# Altium PCB zhangting v0.0.PcbDoc
Units mil, origin at the board's own origin, x right, y up, seen from the top; angles counter-clockwise.
Board outline 3228.35 x 2559.06 mil, 2 copper layers (Top Layer, Bottom Layer); 70 components, 69 nets, 305 pads, 291 vias.
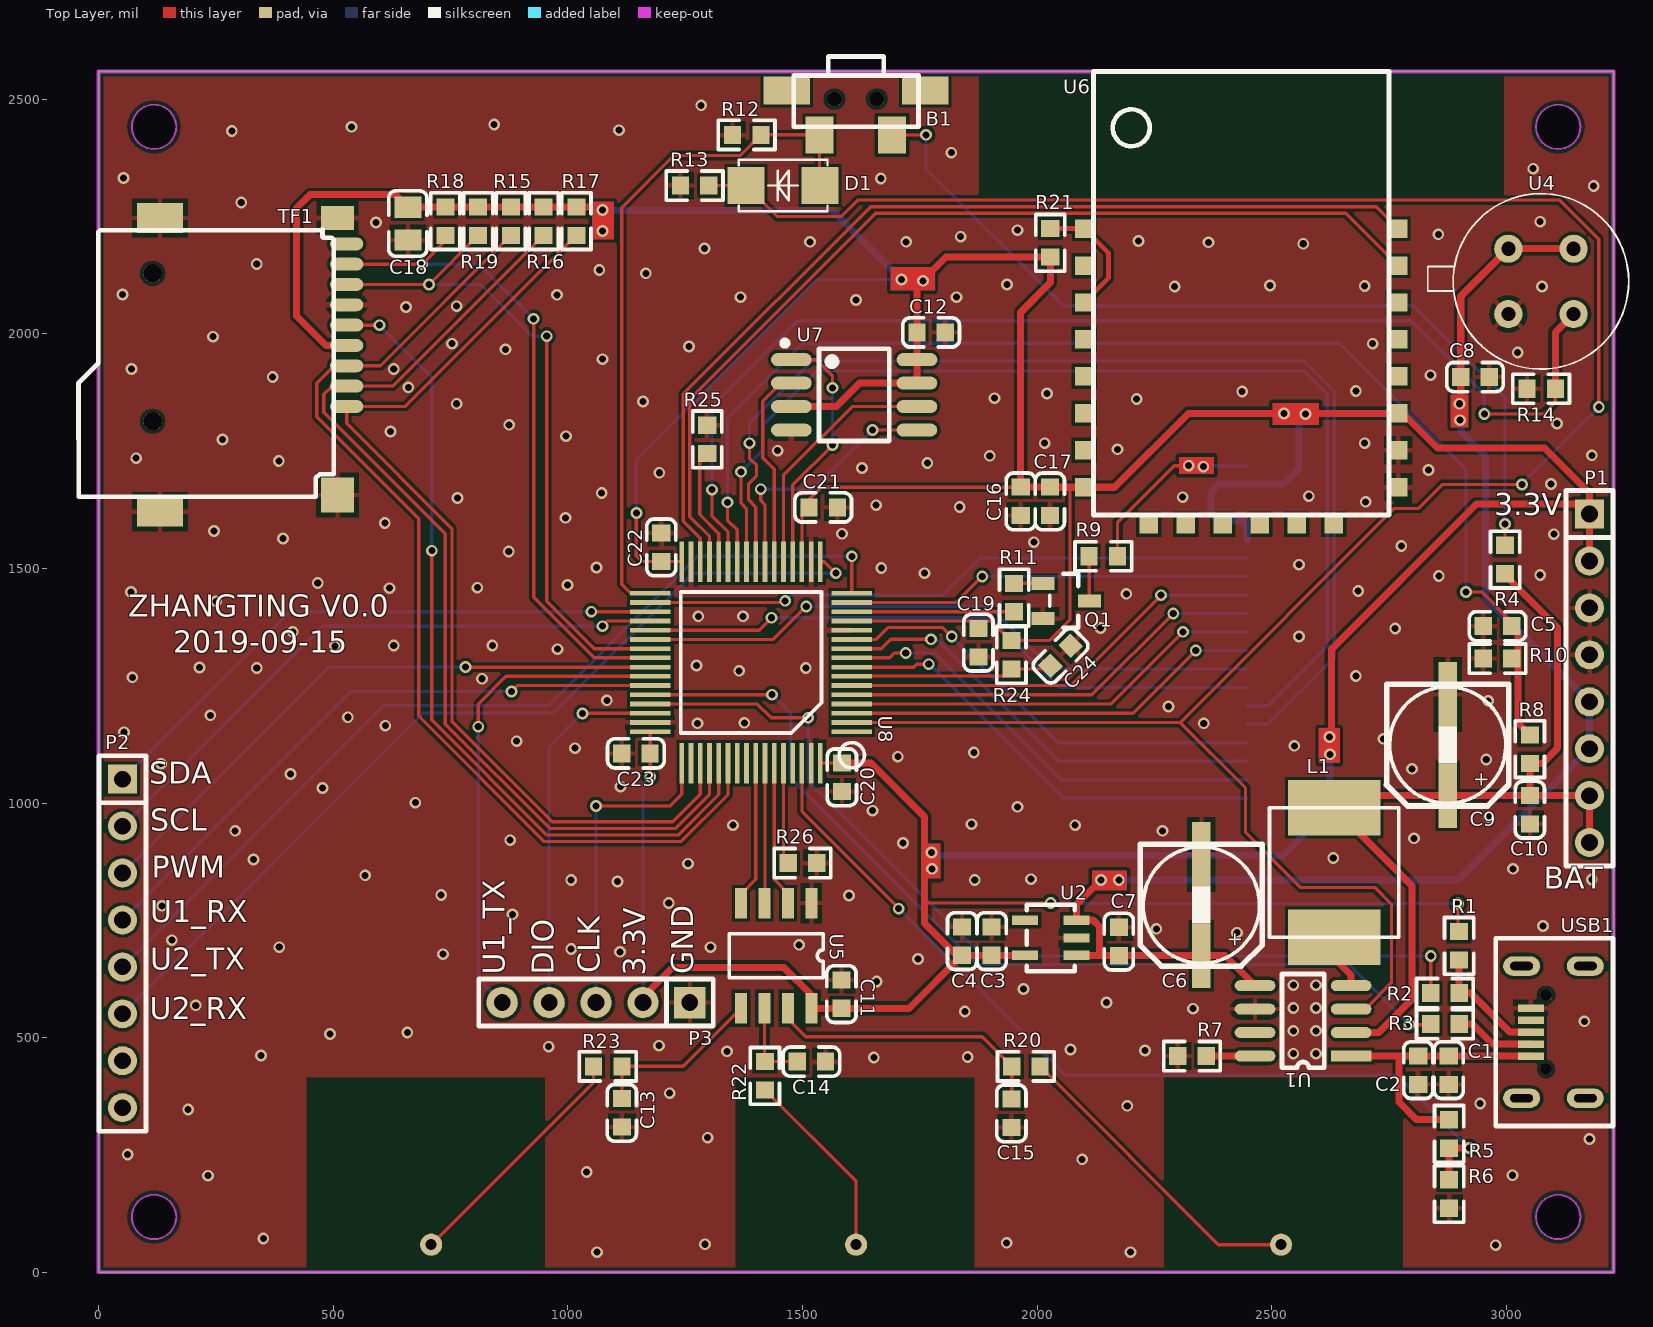
[diagram p0: Top Layer view]
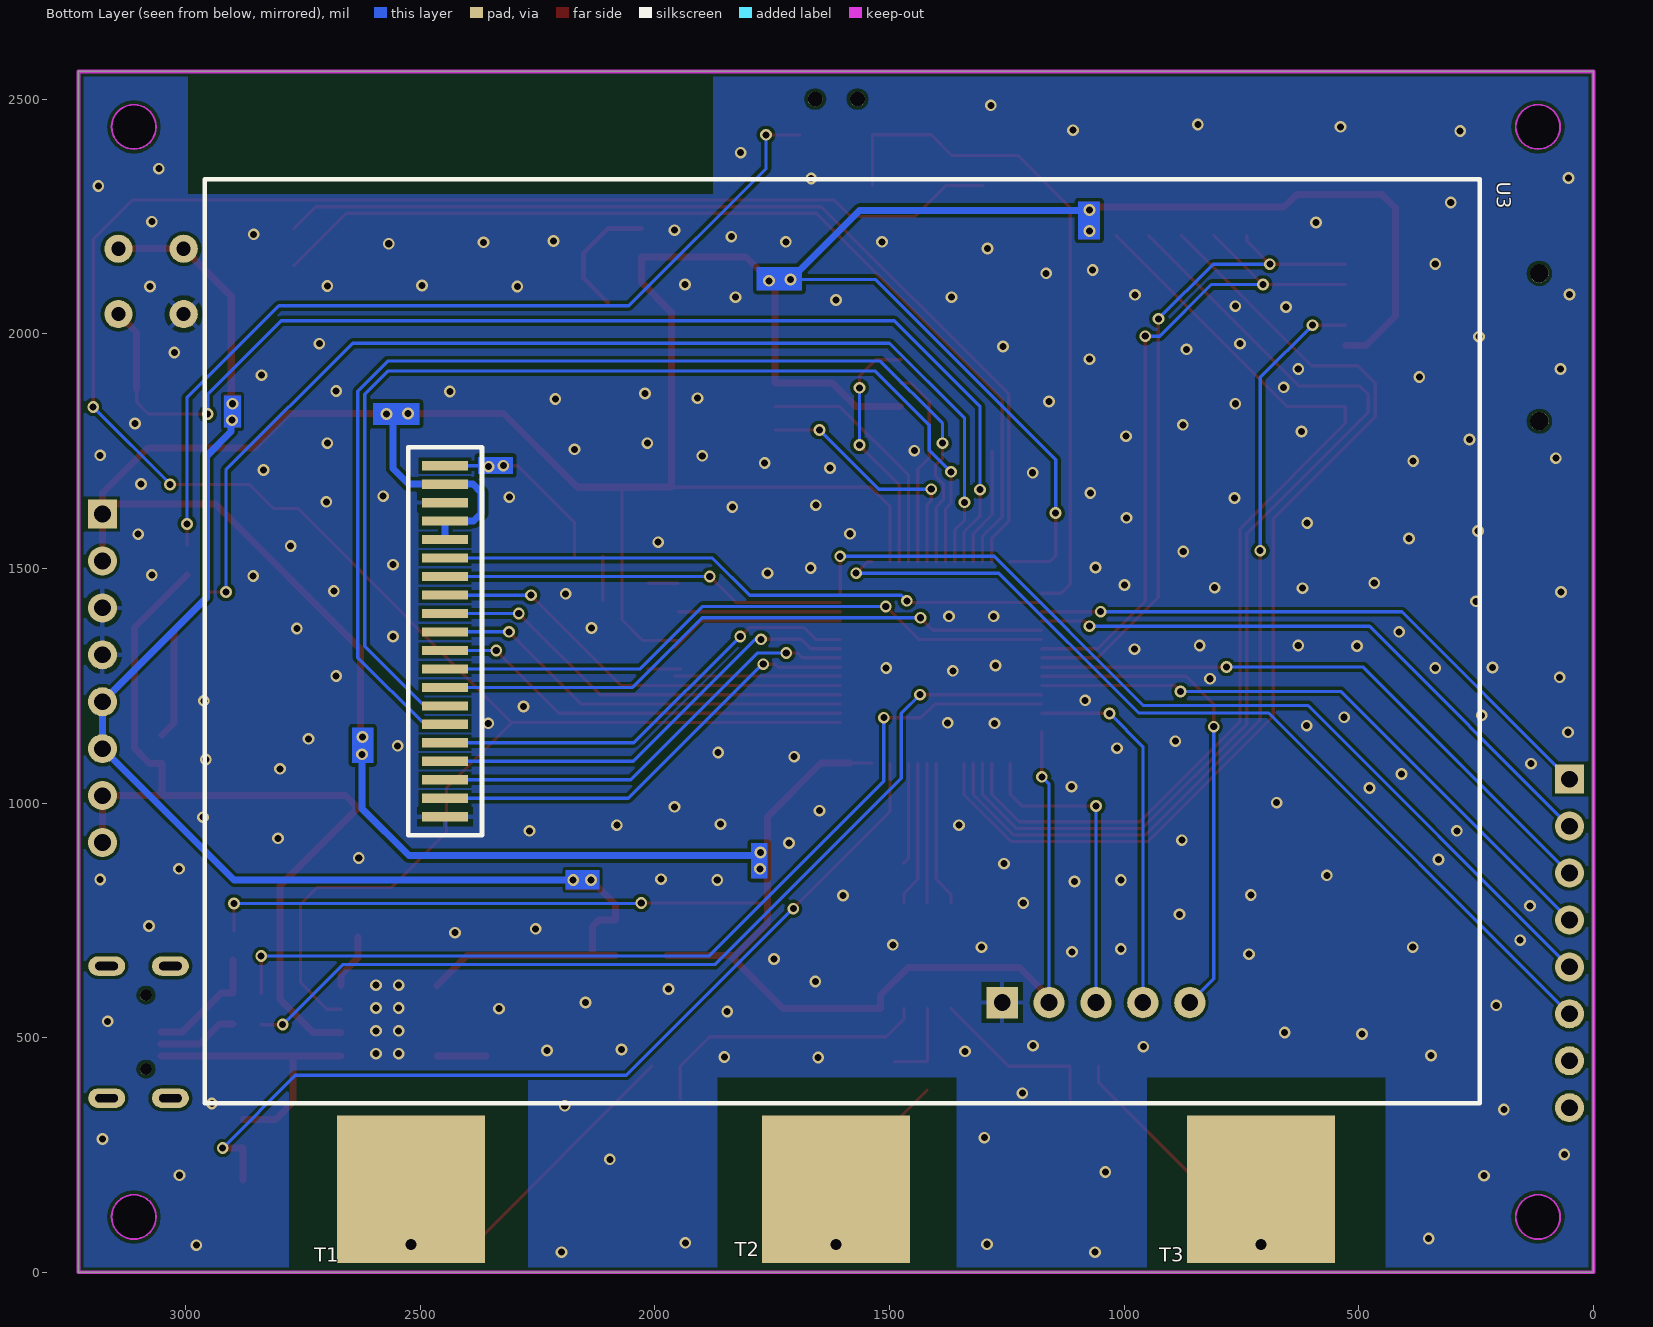
[diagram p1: Bottom Layer view, seen from below]
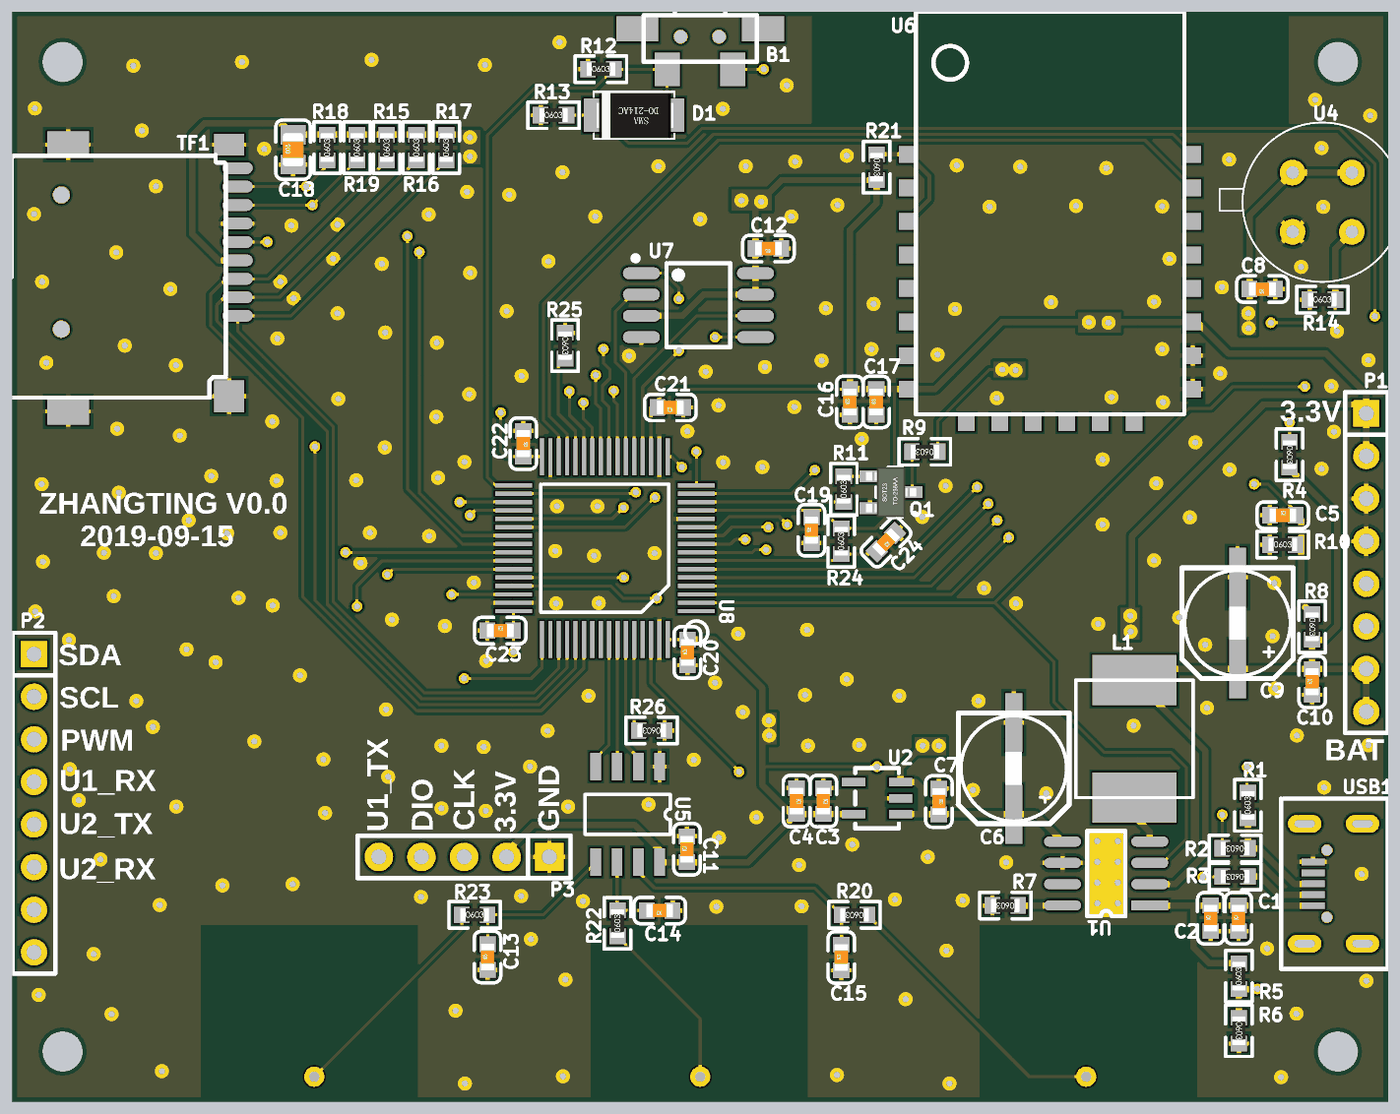
[diagram p2: 3D render of the assembled board from above, using the file's embedded part models]

## Layer stack, top to bottom
Top Layer: signal copper 1.4
Dielectric: dielectric 12.6, FR-4, Dk 4.8
Bottom Layer: signal copper 1.4

## Board outline
0,0 3228.35,0 3228.35,2559.06 0,2559.06
cut-out: 3062.99,118.11 ccw(c3110.24,118.11) 3110.24,70.87 ccw(c3110.24,118.11) 3157.48,118.11 ccw(c3110.24,118.11) 3110.24,165.35 ccw(c3110.24,118.11)
cut-out: 70.87,118.11 ccw(c118.11,118.11) 118.11,70.87 ccw(c118.11,118.11) 165.35,118.11 ccw(c118.11,118.11) 118.11,165.35 ccw(c118.11,118.11)
cut-out: 118.11,2393.7 cw(c118.11,2440.94) 70.87,2440.94 cw(c118.11,2440.94) 118.11,2488.19 cw(c118.11,2440.94) 165.35,2440.94 cw(c118.11,2440.94)
cut-out: 3062.99,2440.94 ccw(c3110.24,2440.94) 3110.24,2393.7 ccw(c3110.24,2440.94) 3157.48,2440.94 ccw(c3110.24,2440.94) 3110.24,2488.19 ccw(c3110.24,2440.94)

## Design rules (kind name [scope] priority, off if disabled: settings)
Clearance [All] p1: gap=7
ComponentClearance [All] p1: gap=0 collisioncheckmode=3 verticalgap=0 showdistances=FALSE
HoleToHoleClearance [All] p1: gap=0 allowstackedmicrovias=TRUE
MinimumSolderMaskSliver [All] p1: minsoldermaskwidth=0
PolygonConnect PolygonConnect_1 [IsVia] p1: connectstyle=Direct reliefconductorwidth=10 reliefentries=4 polygonreliefangle="90 Angle" airgapwidth=10
PolygonConnect [All] p2: connectstyle=Relief reliefconductorwidth=10 reliefentries=4 polygonreliefangle="90 Angle" airgapwidth=10
RoutingVias [All] p1: holewidth=25 width=35 viastyle="Through Hole" minholewidth=15 minwidth=25 maxholewidth=80 maxwidth=100
SilkToSilkClearance [All] p1: silktosilkclearance=0
SilkToSolderMaskClearance [IsPad] p1: minsilkscreentomaskgap=0 clearancetoexposedcopper=TRUE
SolderMaskExpansion [All] p1: expansion=4
Width [All] p1: maxlimit=35 minlimit=7 preferedwidth=10
23 further rules are at their usual default settings.

## Components (designator, comment, footprint, x,y, rotation, side; value= is the part's Value field where it differs from the comment)
B1 "BUTTON侧贴" BUTTON侧贴 1614,2499 r0 top locked
C1 "10uF (106) 10% 10V" 0603_C 2877,431 r90 top
C2 "100nF (104) 10% 50V" 0603_C 2812,431 r90 top
C3 "10uF (106) 10% 10V" 0603_C 1903,706 r270 top
C4 "100nF (104) 10% 50V" 0603_C 1840,706 r270 top
C5 "100nF (104) 10% 50V" 0603_C 2981,1377 r0 top
C6 "220uF/10V" SMD-6.5mm 2348,777 r90 top
C7 "100nF (104) 10% 50V" 0603_C 2174,705 r270 top
C8 "100nF (104) 10% 50V" 0603_C 2933,1908 r180 top
C9 "220uF/10V" SMD-6.5mm 2873,1118 r90 top
C10 "100nF (104) 10% 50V" 0603_C 3050,986 r90 top
C11 "100nF (104) 10% 50V" 0603_C 1583,593 r90 top
C12 "100nF (104) 10% 50V" 0603_C 1774,2003 r180 top
C13 "20pF (200) 5% 50V" 0603_C 1115,340 r90 top
C14 "20pF (200) 5% 50V" 0603_C 1519,449 r180 top
C15 "20pF (200) 5% 50V" 0603_C 1945,339 r90 top
C16 "10uF (106) 10% 10V" 0603_C 1965,1643 r90 top
C17 "100nF (104) 10% 50V" 0603_C 2027,1643 r90 top
C18 "100nF(104) 10% 50V" 0805_C 659,2235 r90 top
C19 "100nF (104) 10% 50V" 0603_C 1875,1342 r90 top
C20 "100nF (104) 10% 50V" 0603_C 1584,1055 r90 top
C21 "100nF (104) 10% 50V" 0603_C 1544,1630 r180 top
C22 "100nF (104) 10% 50V" 0603_C 1199,1545 r270 top
C23 "100nF (104) 10% 50V" 0603_C 1145,1106 r0 top
C24 "100nF (104) 10% 50V" 0603_C 2050,1314 r225 top
D1 "IN4148" DIODE(SMA) 1380,2316 r90 top
L1 "2.2uH" L(CD74) 2633,852 r270 top
P1 "2.54*8" 2.54*8 3177,1616 r270 top locked
P2 "2.54*8" 2.54*8 51,1051 r270 top locked
P3 "2.54*5" 2.54*5 1260,575 r180 top
Q1 "SS8050 Y1" SOT-23(SOT-23-3) 2062,1431 r180 top
R1 "1.5KΩ (1501) ±1%" 0603_R 2899,696 r90 top
R2 "22Ω (22R0) ±1%" 0603_R 2869,595 r180 top
R3 "22Ω (22R0) ±1%" 0603_R 2869,529 r180 top
R4 "2KΩ (2001) ±1%" 0603_R 2997,1519 r270 top
R5 "2KΩ (2001) ±1%" 0603_R 2878,295 r90 top
R6 "3KΩ (3001) ±1%" 0603_R 2878,167 r270 top
R7 "1KΩ (1001) ±1%" 0603_R 2330,461 r180 top
R8 "1MΩ (1004) ±1%" 0603_R 3050,1115 r270 top
R9 "100Ω (1000) ±1%" 0603_R 2141,1526 r180 top
R10 "1MΩ (1004) ±1%" 0603_R 2981,1308 r0 top
R11 "1KΩ (1001) ±1%" 0603_R 1951,1438 r90 top
R12 "10KΩ (1002) ±1%" 0603_R 1381,2424 r0 top
R13 "10KΩ (1002) ±1%" 0603_R 1270,2316 r0 top
R14 "5.1KΩ (5101) ±1%" 0603_R 3074,1883 r0 top
R15 "47KΩ (4702) ±1%" 0603_R 878.5,2240 r90 top
R16 "47KΩ (4702) ±1%" 0603_R 948.25,2240 r90 top
R17 "47KΩ (4702) ±1%" 0603_R 1018,2240 r90 top
R18 "47KΩ (4702) ±1%" 0603_R 739,2240 r90 top
R19 "47KΩ (4702) ±1%" 0603_R 808.75,2240 r90 top
R20 "200Ω (2000) ±1%" 0603_R 1976,439 r180 top
R21 "10KΩ (1002) ±1%" 0603_R 2028,2194 r270 top
R22 "200Ω (2000) ±1%" 0603_R 1420,419 r90 top
R23 "200Ω (2000) ±1%" 0603_R 1085,439 r0 top
R24 "10KΩ (1002) ±1%" 0603_R 1945,1316 r90 top
R25 "10KΩ (1002) ±1%" 0603_R 1297,1775 r270 top
R26 "10KΩ (1002) ±1%" 0603_R 1500,872 r180 top
T1 "touch pad" "touch pad" 2519.69,177.17 r0 top locked (schematic designator t1)
T2 "touch pad" "touch pad" 1614.17,177.17 r0 top locked (schematic designator t2)
T3 "touch pad" "touch pad" 708.66,177.17 r0 top locked (schematic designator t3)
TF1 "TF_CARD" TF_CARD 131,2239 r270 top
U1 "ETA9640" SOP-8#1 2669,461 r180 top
U2 "SPX3819" SOT23-5 1972,676 r90 top
U3 "2.8TFT" 2.8TFT 2447,1719 r180 bottom locked
U4 "TGS2602" TGS2602 3075,2116 r135 top locked
U5 "CT8224-3" SOP-8#2 1519,787 r270 top
U6 "ESP-12F" ESP-12F 2426,1979 r0 top locked
U7 "W25Q128JVSIQTR" SOIC-8_208mil 1610,1870 r270 top
U8 "STM32F103RBT6" LQFP64 1605,1152 r180 top locked
USB1 "USB-5" USB-5 3160,519 r180 top

## Footprints (in the part's own frame and the unit in brackets; to place one, negate y for a bottom-side part, rotate by r counter-clockwise, add the part's x,y. Pads: shape width x height; smd on the part's side, far side on the other; paste and mask are expansions set on the pad)
2.8TFT [mm]
  rect 2.5x0.5 smd: 1(0,0) 2(0,-1) 3(0,-2) 4(0,-3) 5(0,-4) 6(0,-5) 7(0,-6) 8(0,-7) 9(0,-8) 10(0,-9) 11(0,-10) 12(0,-11) 13(0,-12) 14(0,-13) 15(0,-14) 16(0,-15) 17(0,-16) 18(0,-17) 19(0,-18) 20(0,-19)
  silkscreen extent -13,-34.51 56.01,15.5
2.54*5 [mm]
  rect 1.7x1.7 hole 0.9: 1(0,0)
  round 1.7 hole 0.9: 2(2.54,0) 3(5.08,0) 4(7.62,0) 5(10.16,0)
  silkscreen extent -1.27,-1.27 11.43,1.27
2.54*8 [mm]
  rect 1.57x1.57 hole 0.9: 1(0,0)
  round 1.57 hole 0.9: 2(2.54,0) 3(5.08,0) 4(7.62,0) 5(10.16,0) 6(12.7,0) 7(15.24,0) 8(17.78,0)
  silkscreen extent -1.27,-1.27 19.05,1.27
0603_C [mm]
  rect 0.93x0.98 smd: 1(-0.77,0) 2(0.77,0)
  silkscreen extent -1.53,-0.79 1.54,0.79, body extent -0.8,-0.4 0.8,0.4, height 0.3
0603_R [mm]
  rect 0.93x0.98 smd: 1(-0.77,0) 2(0.77,0)
  silkscreen extent -1.53,-0.79 1.54,0.79, body extent -0.85,-0.4 0.85,0.4, height 0.56
0805_C [mm]
  rect 1.16x1.47 smd: 1(-0.89,0) 2(0.89,0)
  silkscreen extent -1.77,-1.04 1.77,1.04, body extent -1,-0.62 1,0.63, height 0.77
BUTTON侧贴 [mm]
  rect 2.5x1.5 smd: 0(-3.746,0.491) 0(3.746,0.491)
  round 0.8 hole 0.8: 0(-1.163,0.031) 0(1.127,0.031)
  rect 1.5x2 smd: 1(-1.973,-1.914) 2(1.947,-1.914)
  silkscreen extent -3.36,-1.47 3.38,2.34
DIODE(SMA) [mm]
  rect 2x2 smd: 1(0,-4) 2(0,0)
  silkscreen extent -1.4,-4.4 1.4,0.4, body extent -1.37,-4.36 1.33,0.24, height 2.4
ESP-12F [mm]
  rect 1x1 smd: 1(-8.272,6.229) 2(-8.272,4.229) 3(-8.272,2.229) 4(-8.272,0.229) 5(-8.272,-1.771) 6(-8.272,-3.771) 7(-8.272,-5.771) 8(-8.272,-7.771) 9(-4.772,-9.771) 10(-2.772,-9.771) 11(-0.772,-9.771) 12(1.228,-9.771) 13(3.228,-9.771) 14(5.228,-9.771) 15(8.728,-7.771) 16(8.728,-5.771) 17(8.728,-3.771) 18(8.728,-1.771) 19(8.728,0.229) 20(8.728,2.229) 21(8.728,4.229) 22(8.728,6.229)
  silkscreen extent -7.77,-9.27 8.23,14.73
L(CD74) [mm]
  rect 3x5 smd: 1(-3.5,0) 2(3.5,0)
  silkscreen extent -3.5,-3.5 3.5,3.5
LQFP64 [mm] "LQFP64"
  rect 2.2x0.254 smd: 1(0,0) 2(0,-0.5) 3(0,-1) 4(0,-1.5) 5(0,-2) 6(0,-2.5) 7(0,-3) 8(0,-3.5) 9(0,-4) 10(0,-4.5) 11(0,-5) 12(0,-5.5) 13(0,-6) 14(0,-6.5) 15(0,-7) 16(0,-7.5) 33(10.9,-7.5) 34(10.9,-7) 35(10.9,-6.5) 36(10.9,-6) 37(10.9,-5.5) 38(10.9,-5) 39(10.9,-4.5) 40(10.9,-4) 41(10.9,-3.5) 42(10.9,-3) 43(10.9,-2.5) 44(10.9,-2) 45(10.9,-1.5) 46(10.9,-1) 47(10.9,-0.5) 48(10.9,0)
  rect 0.254x2.2 smd: 17(1.7,-9.2) 18(2.2,-9.2) 19(2.7,-9.2) 20(3.2,-9.2) 21(3.7,-9.2) 22(4.2,-9.2) 23(4.7,-9.2) 24(5.2,-9.2) 25(5.7,-9.2) 26(6.2,-9.2) 27(6.7,-9.2) 28(7.2,-9.2) 29(7.7,-9.2) 30(8.2,-9.2) 31(8.7,-9.2) 32(9.2,-9.2) 49(9.2,1.7) 50(8.7,1.7) 51(8.2,1.7) 52(7.7,1.7) 53(7.2,1.7) 54(6.7,1.7) 55(6.2,1.7) 56(5.7,1.7) 57(5.2,1.7) 58(4.7,1.7) 59(4.2,1.7) 60(3.7,1.7) 61(3.2,1.7) 62(2.7,1.7) 63(2.2,1.7) 64(1.7,1.7)
  silkscreen extent -0.68,-7.56 9.26,1.95
SMD-6.5mm [mm]
  rect 3.5x1 smd: 1(-2.593,-0.049) 2(2.882,-0.049)
  silkscreen extent -3.16,-3.35 3.44,3.26
SOIC-8_208mil [mm]
  oval 0.7x2.2 smd: 1(-1.905,-3.4) 2(-0.635,-3.4) 3(0.635,-3.4) 4(1.905,-3.4) 5(1.905,3.4) 6(0.635,3.4) 7(-0.635,3.4) 8(-1.905,3.4)
  silkscreen extent -2.95,-3.9 2.5,1.9
SOP-8#1 [mm]
  rect 2.2x0.6 smd: 1(0,0)
  oval 2.2x0.6 smd: 2(0,-1.27) 3(0,-2.54) 4(0,-3.81) 5(5.2,-3.81) 6(5.2,-2.54) 7(5.2,-1.27) 8(5.2,0)
  silkscreen extent 1.46,-4.44 3.74,0.64
SOP-8#2 [mm]
  rect 1.651x0.635 smd: 1(0,0) 2(0,-1.27) 3(0,-2.54) 4(0,-3.81) 5(5.7,-3.81) 6(5.7,-2.54) 7(5.7,-1.27) 8(5.7,0)
  silkscreen extent 1.66,-4.45 4.04,0.64
SOT23-5 [mil]
  rect 20x55.12 smd: 1(-0.5,-112.12) 2(36.5,-112.12) 3(74.5,-112.12) 4(74.5,-1.88) 5(-0.5,-1.88)
  silkscreen extent -34,-108 107,-6
SOT-23(SOT-23-3) [mm]
  rect 1.25x0.7 smd: 1(1.25,-0.95) 2(1.25,0.95) 3(-1.25,0)
  silkscreen extent -0.65,-1.46 0.9,1.46, body extent -1.5,-1.5 1.5,1.5, height 1.3
TF_CARD [mm]
  oval 0.7x1.8 smd: 1(10,10.1) 2(8.9,10.1) 3(7.8,10.1) 4(6.7,10.1) 5(5.6,10.1) 6(4.5,10.1) 7(3.4,10.1) 8(2.3,10.1) 9(1.2,10.1)
  rect 1.3x1.8 smd: 10(-0.2,9.6)
  rect 1.6x2.5 smd: 11(-0.2,0) 12(15.7,0)
  rect 1.9x1.8 smd: 13(14.8,9.6)
  round 1 hole 1: 14(10.8,-0.4) 15(2.8,-0.4)
  silkscreen extent 0.41,-4.42 14.88,9.4
TGS2602 [mil]
  round 60 hole 30: 1(-2,102.43) 2(-100.43,4) 3(-2,-94.43) 4(96.43,4)
  silkscreen extent -189,-183 191,191
"touch pad" [mm]
  round 1.2 hole 0.6: 1(0,-3)
  rect 8x8 smd far side: 1(0,0)
USB-5 [mm]
  oval 2x1.05 hole 0.45 slot 1.225 at 0 deg: 0(-0.207,3.753) 0(-0.207,-3.397) 0(3.243,3.753) 0(3.243,-3.397)
  round 0.65 hole 0.65: 0(1.918,2.178) 0(1.918,-1.822)
  rect 1.4x0.4 smd: 1(2.743,1.478) 2(2.743,0.828) 3(2.743,0.178) 4(2.743,-0.472) 5(2.743,-1.122)
  silkscreen extent -1.7,-4.9 4.65,5.26

## Part data
C1 C3 C16: library part "0603 10uF (106) 10% 10V", "贴片电容"
C2 C4 C5 C7 C8 C10 C11 C12 C17 C19 C20 C21 C22 C23 C24: library part "0603 100nF (104) 10% 50V", "贴片电容"
C6 C9: library part SMD-CAP
C13 C14 C15: library part "0603 20pF (200) 5% 50V", "贴片电容"
C18: library part "0805 100nF(104) 10% 50V", "贴片电容"
D1: library part 肖特基二极管
L1: library part L(CD74)
Q1: library part "SOT-23 SS8050 Y1", "三极管"
R1: library part "0603 1.5KΩ (1501) 1%", "贴片电阻"
R2 R3: library part "0603 22Ω (22R0) 1%", "贴片电阻"
R4 R5: library part "0603 2KΩ (2001) 1%", "贴片电阻"
R6: library part "0603 3KΩ (3001) 1%", "贴片电阻"
R7 R11: library part "0603 1KΩ (1001) 1%", "贴片电阻"
R8 R10: library part "0603 1MΩ (1004) 1%", "贴片电阻"
R9: library part "0603 100Ω (1000) 1%", "贴片电阻"
R12 R13 R21 R24 R25 R26: library part "0603 10KΩ (1002) 1%", "贴片电阻"
R14: library part "0603 5.1KΩ (5101) 1%", "贴片电阻"
R15 R16 R17 R18 R19: library part "0603 47KΩ (4702) 1%", "贴片电阻"
R20 R22 R23: library part "0603 200Ω (2000) 1%", "贴片电阻"
U7: library part W25Q128JVSIQTR_[C97521], "Flash ROM"

## Via types
v1: diameter 25, hole 15, Top Layer to Bottom Layer, 291 vias

## Nets (pads, with @x,y where several pads share a name; then routed paths per layer and width w, separated by ;. In a path a pad name is that pad's centre, name@x,y a point inside that pad or via, vN(x,y) a via of type N, cw(c..) or ccw(c..) an arc to the next point about the centre after c; other vN are vias at no path point)
BAT: C9.1 C10.2 L1.1 P1.7 P1.8 R4.2 R8.2 U1.2 | length 1846.8
  Top Layer w15: U1.2 2728,511 2799,582 2799,823.8 L1.1 2659.13,1015.93 C9.1 3176.93,1015.93 3176.93,916.07 P1.8 ; R4.2@2997,1486 3109,1374 3109,1117 3076.68,1084.68 R8.2 C10.2
BOOT0: R26.2 U8.60 | length 217.4
  Top Layer w7: U8.60 1459.33,882.35 R26.2
BOOT1: R25.2 U8.28 | length 252.6
  Top Layer w7: R25.2@1281,1750 1281,1615 1321.54,1574.46 U8.28
CO2_PWM: P2.3 U8.41 | length 1306.7
  Top Layer w7: v1@782,1289.8 U8.41
  Bottom Layer w7: P2.3 490,1290 v1(782,1290)
DIANLIANG: C5.2 R8.1 R10.2 U8.26 | length 2689.4
  Top Layer w7: v1(1340,1641) 1340,1603 1360.91,1582.09 U8.26 ; v1(2914,1450) 2947,1450 3011.31,1385.68 C5.2
  Top Layer w15: C5.2@3024.69,1365 3024.69,1170.63 R8.1
  Bottom Layer w7: v1(1340,1641) 1340,1820 1500,1980 2644,1980 2914,1710 v1(2914,1450)
F_CLK: U7.6 U8.21 | length 529.4
  Top Layer w7: U8.21 1459.33,1698.33 1606,1845 U7.6
F_CS: U7.1 U8.20 | length 533.4
  Top Layer w7: U7.1 1529,1945 1564,1910 v1(1564,1885) ; U8.20 1479.02,1678.02 v1(1564,1763)
  Bottom Layer w7: v1(1564,1763) v1(1564,1885)
F_MISO: U7.2 U8.22 | length 429.3
  Top Layer w7: U8.22 1439.65,1711.35 1415,1736 1415,1856 1454,1895 U7.2
F_MOSI: U7.5 U8.23 | length 543.6
  Top Layer w7: v1(1411,1669) 1411,1645 1419.96,1636.04 U8.23 ; v1(1649,1795) U7.5
  Bottom Layer w7: v1(1411,1669) 1523,1669 v1(1649,1795)
GND: C1.1 C2.1 C3.1 C4.1 C5.1 C6.2 C7.1 C8.1 C9.2 C10.1 C11.2 C12.1 C13.1 C14.1 C15.1 C16.1 C17.1 C18.1 C19.1 C20.1 C21.1 C22.1 C23.1 C24.1 P1.3 P1.4 P3.1 Q1.2 R6.2 R7.2 R10.1 R12.1 R13.1 R14.1 R25.1 R26.1 TF1.6 TF1.10 TF1.11 TF1.12 TF1.13 U1.6 U2.2 U3.3 U3.20 U4.1 U5.1 U6.15 U6.16 U7.4 U8.12 U8.18 U8.31 U8.47 U8.63 USB1.5
  other v1: 1062,43 2199,43 2977,58 1292,60 1935,63 351,72 233,206 3013,207 1040,214 2096,241 62,251 3177,284 1298,287 191,347 2192,355 2944,360 1217,382 1652,458 1852,459 346,462 2546,466 2594,466 1339,471 2230,473 2071,475 959,481 1194,483 493,508 658,511 2546,514.67 2594,514.67 3166,535 1846,556 2332,562 2546,563.33 2594,563.33 207,569 2148,575 1971,604 2546,612 2594,612 1658,620 1746,668 734,678 1111,683 1007,689 385,693 1304,693 1493,698 156,708 2426,724 2254,732 3078,738 882,763 135,781 1215,787 1599,803 730,804 1106,833 1007,836 1867,836 3182,837 1987,838 568,846 3014,860 1256,871 330,880 2631,883 1714,915 877,921 2803,925 291,941 2267,941 1352,953 2081,953 1860,955 2963,970 1649,984 1958,992 675,1001 477,1032 1112,1035 409,1062 2799,1073 133,1084 2957,1093 1703,1099 1865,1108 1015,1117 2548,1122 891,1132 2738,1137 54,1151 611,1165 1276,1170 2355,1170 1376,1171 531,1183 238,1187 2280,1206 2961,1218 1083,1219 817,1265 72,1268 2679,1271 1365,1282 337,1288 1507,1288 215,1289 1274,1293 978,1328 504,1335 629,1336 839,1336 2558,1355 414,1365 2763,1372 2135,1373 1278,1398 1373,1398 250,1430 2190,1446 69,1450 2684,1452 620,1458 807,1459 999,1465 467,1469 2856,1484 3072,1486 1760,1490 1668,1501 1061,1502 2558,1508 874,1536 2776,1548 1993,1556 393,1564 3101,1573 1584,1574 246,1580 610,1597 995,1608 1835,1631 1657,1635 2700,1642 765,1650 2310,1652 2579,1654 1072,1661 3095,1680 1195,1704 2834,1710 1627,1714 1766,1725 384,1729 80,1735 1899,1740 3182,1741 1447,1751 2171,1754 2016,1767 2698,1767 264,1775 996,1782 622,1792 875,1806 3108,1809 763,1851 1160,1856 2212,1861 1909,1863 2021,1873 2437,1877 2679,1878 660,1886 371,1908 2838,1912 70,1925 629,1925 1074,1946 3024,1960 867,1967 1258,1973 753,1979 2715,1979 244,1994 655,2057 763,2059 1614,2072 1368,2078 1828,2078 977,2083 51,2084 2293,2101 3076,2101 2698,2102 2496,2103 1936,2105 1166,2129 1067,2136 337,2149 1291,2182 2567,2192 2365,2195 1516,2196 1721,2196 2216,2198 1837,2207 2855,2212 1958,2221 591,2237 3072,2239 304,2280 3186,2315 1667,2331 53,2332 3057,2352 1817,2386 284,2432 1109,2434 539,2441 843,2446 1284,2487
KEY1: B1.1 D1.1 R12.2 U8.33 | length 1465.4
  Top Layer w7: U8.33 1133.73,1447.28 1115,1466 1115,2269 1226,2380 1367.32,2380 R12.2 1535.99,2424 1535.99,2317.49 D1.1
LCD_CS: U3.7 U8.15 | length 865.2
  Top Layer w7: U8.15 1827.59,1427.59 v1(1883,1483)
  Bottom Layer w7: v1@1882.78,1482.78 U3.7
LCD_DB0: U3.19 U8.8 | length 960.9
  Top Layer w7: U8.8 1736.8,1289.8 1743,1296 v1(1769,1296)
  Bottom Layer w7: v1@1771,1296 2056.66,1010.34 U3.19
LCD_DB1: U3.18 U8.9 | length 958.3
  Top Layer w7: U8.9 1685.48,1309.48 1696,1320 v1(1720,1320)
  Bottom Layer w7: v1(1720,1320) 1781,1320 2051.29,1049.71 U3.18
LCD_DB2: U3.17 U8.10 | length 957.9
  Top Layer w7: U8.10 1668.16,1329.16 1688,1349 v1(1774,1349)
  Bottom Layer w7: v1(1774,1349) 1786,1349 2045.92,1089.08 U3.17
LCD_DB3: U3.16 U8.11 | length 954.1
  Top Layer w7: U8.11 1656.85,1348.85 1682,1374 1799,1374 v1(1818,1355)
  Bottom Layer w7: v1(1818,1355) 2044.55,1128.45 U3.16
LCD_DB4: U3.15 U8.24 | length 2454.9
  Top Layer w7: v1(1387,1767) 1387,1735 1402,1720 1402,1698 1385,1681 1385,1646 1400.28,1630.72 U8.24
  Bottom Layer w7: v1(1387,1767) 1387,1809 1520,1942 2569,1942 2633,1878 2633,1310 2490.82,1167.82 U3.15
LCD_DB5: U3.14 U8.25 | length 2346.9
  Top Layer w7: v1(1369,1706) 1369,1639 1380.59,1627.41 U8.25
  Bottom Layer w7: v1(1369,1706) 1415,1752 1415,1805 1531,1921 2568,1921 2618,1871 2618,1334 2491.19,1207.19 U3.14
LCD_DB6: U3.13 U8.37 | length 1343.6
  Top Layer w7: U8.37 1407.53,1368.53 v1(1434,1395)
  Bottom Layer w7: v1(1434,1395) 1899,1395 2047.44,1246.56 U3.13
LCD_DB7: U3.12 U8.38 | length 1355.3
  Top Layer w7: U8.38 1437.85,1348.85 v1(1508,1419)
  Bottom Layer w7: v1(1508,1419) 1898,1419 2031.07,1285.93 U3.12
LCD_PWM: R11.1 U8.14 | length 345.8
  Top Layer w7: U8.14 R11.1@1950.78,1407.91
LCD_RD: U3.11 U8.3 | length 897.5
  Top Layer w7: U8.3 2204.37,1191.37 v1(2338,1325)
  Bottom Layer w7: v1(2338,1325) 2446.7,1325 U3.11
LCD_RESET: U3.8 U8.6 | length 921.9
  Top Layer w7: U8.6 2071.43,1250.43 v1(2264,1443)
  Bottom Layer w7: v1(2264,1443) 2446.59,1443 U3.8
LCD_RS: U3.9 U8.5 | length 913.8
  Top Layer w7: U8.5 2116.74,1230.74 v1(2290,1404)
  Bottom Layer w7: v1(2290,1404) U3.9 U3.9
LCD_TE: U3.6 U8.34 | length 1310.3
  Top Layer w7: U8.34 1459.59,1427.59 v1(1463,1431)
  Bottom Layer w7: v1(1463,1431) 1475,1443 1798,1443 1877.15,1522.15 U3.6
LCD_WR: U3.10 U8.4 | length 905.9
  Top Layer w7: U8.4 2157.06,1211.05 v1(2311,1365)
  Bottom Layer w7: v1(2311,1365) 2446.67,1365 U3.10
NetB1_2: B1.2 R4.1 | length 1895.1
  Top Layer w7: B1.2 1762.66,2423.66 v1(1763,2424) ; R4.1 v1(2997,1595)
  Bottom Layer w7: v1(1763,2424) 1763,2352.32 2055.32,2060 2801,2060 2997,1864 v1(2997,1595)
NetC1_2: C1.2 C2.2 R5.2 U1.1 USB1.1 | length 603.5
  Top Layer w15: U1.1 2669.18,460.82 2771,460.82 ; R5.2 2808.68,325.32 2771,363 2771,460.82 ; USB1.1 2771,460.82
NetC13_2: C13.2 R23.2 U5.5 | length 373.7
  Top Layer w7: C13.2 1115.32,370.63 R23.2 1245.41,439 U5.5
NetC14_2: C14.2 R22.2 U5.6 | length 182.5
  Top Layer w7: U5.6 1419,450.32 R22.2 1488.37,449.32 C14.2
NetC15_2: C15.2 R20.2 U5.7 | length 611.1
  Top Layer w7: U5.7 1469,540 1507,502 1882.68,502 R20.2 1945.68,370 C15.2
NetL1_2: L1.2 U1.4 | length 118.1
  Top Layer w15: L1.2 2633,670 2669,634 U1.4
NetQ1_1: Q1.1 R11.2 | length 61.7
  Top Layer w7: R11.2 Q1.1@2012.7,1468.32
NetQ1_3: Q1.3 R9.2 | length 95.2
  Top Layer w7: R9.2 2111.21,1525.47 Q1.3
NetR1_1: R1.1 R2.1 USB1.3 | length 257.9
  Top Layer w15: R1.1 2899.31,665.37 R2.1 2924,595 3007,512 USB1.3
NetR3_1: R3.1 USB1.2 | length 170.3
  Top Layer w15: R3.1 2928,529 2970.59,486.41 USB1.2
NetR7_1: R7.1 U1.8 | length 104
  Top Layer w15: R7.1 U1.8
NetR9_1: R9.1 U3.1 | length 398
  Top Layer w7: R9.1 2171.31,1598.31 2292,1719 v1(2323,1719)
  Bottom Layer w7: v1(2323,1719) U3.1
  other v1: 2354,1717
NetR20_1: R20.1 T1.1 | length 670.7
  Top Layer w7: R20.1 2386.26,59.06 T1.1@2519.69,59.06
NetR21_1: R21.1 U6.1 U6.3 | length 272.6
  Top Layer w10: R21.1 2100.24,2224.31 U6.1 2152,2172.55 2152,2118.44 U6.3
NetR22_1: R22.1 T2.1 | length 410.1
  Top Layer w7: R22.1 1614.17,194.51 T2.1@1614.17,59.06
NetR23_1: R23.1 T3.1 | length 523.3
  Top Layer w7: T3.1@708.66,59.06 1054.69,405.08 R23.1
NRST: C24.2 R24.1 U8.7 | length 423.2
  Top Layer w7: U8.7 1605.58,1270.69 R24.1@1958,1270.69 ; R24.1 C24.2@2015,1285.69
OUT1: U5.4 U8.57 | length 311
  Top Layer w7: U5.4 1369,806 1400.28,837.28 U8.57
OUT2: U5.3 U8.58 | length 298.5
  Top Layer w7: U5.3 1419.96,787.96 U8.58
OUT3: U5.2 U8.59 | length 310.2
  Top Layer w7: U8.59 1439.65,837.35 1469,808 U5.2
SCL: P2.2 U8.36 | length 1306
  Top Layer w7: v1(1074,1377) 1085.22,1388.22 U8.36
  Bottom Layer w7: P2.2 477,1377 v1(1074,1377)
SD_CLK: TF1.5 U8.53 | length 1772.8
  Top Layer w7: TF1.5 v1(598.5,2018.5) ; v1(710,1538) 710,1177.4 955.4,932 1235.2,932 1321.54,1018.33 U8.53
  Bottom Layer w7: v1(598.5,2018.5) 710,1907 v1(710,1538)
SD_CMD: R15.1 TF1.3 U8.54 | length 2221.6
  Top Layer w7: R15.1 600.73,1931.91 TF1.3 501.91,1931.91 465,1895 465,1823 682,1606 682,1185.6 949.6,918 1241,918 1341.22,1018.22 U8.54
SD_D0: R19.1 TF1.7 U8.39 | length 1447.5
  Top Layer w7: TF1.7 v1(704.21,2105.14) R19.1 ; v1(955,1995) 955,1430 1055.84,1329.16 U8.39
  Bottom Layer w7: v1(704.21,2105.14) 813.86,2105.14 924,1995 v1(955,1995)
SD_D1: R18.1 TF1.8 U8.40 | length 1424.3
  Top Layer w7: TF1.8 v1(689.45,2148.45) 739,2198 R18.1 ; v1(927,2032) 927,1438.2 1055.72,1309.48 U8.40
  Bottom Layer w7: v1(689.45,2148.45) 810.55,2148.45 v1(927,2032)
SD_D2: R17.1 TF1.1 U8.51 | length 2113.1
  Top Layer w7: R17.1 653.61,1845.3 TF1.1 528.64,1809.36 753,1585 753,1174 967,960 1223.6,960 1282.17,1018.56 U8.51
SD_D3: R16.1 TF1.2 U8.52 | length 2170.1
  Top Layer w7: R16.1 627.17,1888.61 TF1.2 497.61,1888.61 480,1871 480,1833 739,1574 739,1168.2 961.2,946 1229.4,946 1301.85,1018.45 U8.52
SDA: P2.1 U8.35 | length 1272.7
  Top Layer w7: v1(1049.91,1407.91) U8.35
  Bottom Layer w7: P2.1 407.91,1407.91 v1(1049.91,1407.91)
SWCLK: P3.3 U8.49 | length 678.3
  Top Layer w7: v1(1060,994) 1218,994 1242.8,1018.8 U8.49
  Bottom Layer w7: P3.3 v1(1060,994)
SWDIO: P3.4 U8.46 | length 789.9
  Top Layer w7: v1@1031.37,1191.37 U8.46
  Bottom Layer w7: P3.4 960,1120 v1(1031,1191)
U1_RX: P2.4 U8.43 | length 1331.7
  Top Layer w7: v1(880,1238) 892.43,1250.43 U8.43
  Bottom Layer w7: P2.4 538,1238 v1(880,1238)
U1_TX: P3.5 U8.42 | length 1048.5
  Top Layer w7: v1(809,1163) 809,1211.11 868,1270.11 U8.42
  Bottom Layer w7: v1(809,1163) 809,626 P3.5
U2_RX: P2.6 U8.17 | length 1951.9
  Top Layer w7: U8.17 1546.8,1514.2 v1(1571,1490)
  Bottom Layer w7: P2.6 692,1192 969,1192 1267,1490 v1(1571,1490)
U2_TX: P2.5 U8.16 | length 1995.2
  Top Layer w7: U8.16 v1(1605,1526)
  Bottom Layer w7: P2.5 608,1208 959,1208 1277,1526 v1(1605,1526)
U3_RX: U6.22 U8.30 | length 2081
  Top Layer w7: U8.30 1282.17,1564.83 1246,1601 1246,1872 1645,2271 2722.84,2271 U6.22
U3_TX: U6.21 U8.29 | length 2084
  Top Layer w7: U8.29 1301.85,1568.15 1260,1610 1260,1861 1656,2257 2658.1,2257 U6.21
USB_D+: R2.2 U8.45 | length 2043.4
  Top Layer w7: U8.45 1403.94,1211.05 1433,1182 v1(1512,1182) ; R2.2 v1@2838.68,673.68
  Bottom Layer w7: v1(1512,1182) 1512,1047 1885,674 v1(2839,674)
USB_D-: R3.2 U8.44 | length 2035
  Top Layer w7: U8.44 v1@1434.74,1230.74 ; v1(2793,528) 2837.68,528 R3.2
  Bottom Layer w7: v1(1435,1231) 1475,1191 1475,1053 1872,656 2665,656 v1(2793,528)
USBPOWER: R5.1 R6.1 U8.62 | length 1932.7
  Top Layer w7: U8.62 1498.7,982.3 v1@1705.5,775.5
  Top Layer w15: R6.1 R5.1 2920.69,264.69 v1(2921,265)
  Bottom Layer w7: v1@1705.5,775.5 2061,420 2172.53,420 2766,420 v1(2921,265)
  other v1: 1705,775
VCC3.3: C3.2 C4.2 C11.1 C12.2 C16.2 C17.2 C18.2 C19.2 C20.2 C21.2 C22.2 C23.2 P1.1 P1.2 P3.2 R1.2 R15.2 R16.2 R17.2 R18.2 R19.2 R21.2 R24.2 TF1.4 U2.5 U3.2 U3.4 U3.5 U5.8 U6.8 U6.17 U7.3 U7.7 U7.8 U8.13 U8.19 U8.32 U8.48 U8.64 | length 12710.8
  Top Layer w7: v1(1146,1618) 1146,1527 1158.31,1514.68 C22.2 1242.31,1514.68 U8.32 ; v1@1175.31,1054.32 v1(1175.31,1056) C23.2 1175.31,1151.45 U8.48 ; U8.19 1498.7,1632.02 1540,1673.32 C16.2 ; U8.64 1538.31,1085.32 C20.2 ; U8.13 1901.1,1388.22 R24.2@1958,1331.32 ; 1763,787 v1(2029,787) ; R24.2 2025.32,1346.32 2070,1391 2070,1672.06 ; R1.2@2897,726.32 v1(2897,786)
  Top Layer w15: TF1.4 484.78,1975.22 422,2038 422,2268 451,2297 632.04,2297 C18.2 738.72,2270.04 R18.2 ; R18.2@739,2270.04 1017.72,2270.04 R17.2 v1@1079.68,2270.32 ; P3.2 1160,587 1223,650 1460,650 1519,591 U5.8 1726.91,562.59 C4.2 ; U7.3 1572,1845 1622,1895 U7.7 U7.8 1743.86,2002.83 C12.2 1743.69,2101.68 1805.68,2163.68 R21.2 2028,2109 1965,2046 C16.2 C17.2 ; C20.2 1645.69,1085.32 1760,971 1760,744 1828.31,675.68 C4.2 ; C3.2@1903,675.5 U2.5 ; C3.2 C4.2 ; C17.2@2027,1673.06 U6.8 2165.06,1673.06 2322.54,1830.54 U6.17 2779.46,1830.54 2853,1757 3081,1757 3177,1661 P1.1 ; v1@2627,1130 2627,1328 2936,1637 3156,1637 P1.1 ; P1.2 P1.1
  Bottom Layer w7: v1(1146,1618) 1146,1732 1530,2116 v1(1711,2116) ; P3.2 1160,1040.68 v1(1175.31,1056) ; v1@2029,786 v1(2897,786)
  Bottom Layer w15: v1@1074,2263 1564,2263 v1(1711,2116) ; v1@1775,888 2524,888 2624,988 v1(2624,1104) ; U3.5 U3.4 2386.11,1600.89 2370,1617 2370,1662 2387.63,1679.63 U3.2 2524.63,1679.63 2558,1713 2558,1831
  other v1: 1776,860 1775,895 2623,1141 2572,1829 2526,1830 1757,2113 1074,2219 1074,2264
VCC5.0: C6.1 C7.2 C8.2 P1.5 P1.6 U1.5 U2.1 U2.3 U4.3 U4.4 | length 3142.7
  Top Layer w15: U2.1 2084.69,674.93 2133,674.93 ; v1(2136,836) 2084.12,784.12 U2.3 2119.5,750.5 2133,737 2133,674.93 ; U1.5 2400.35,674.93 C6.1 2133,674.93 ; v1@2902.69,1817.68 C8.2 2902.69,2080.05 U4.4 U4.3
  Bottom Layer w15: v1(2174,836) 2897,836 P1.6 P1.5 2955,1438 2955,1740 2903,1792 v1@2903,1851
  other v1: 2901,1816 2900,1851
VCC_EN: D1.2 R13.2 U1.3 U8.2 | length 5144.9
  Top Layer w7: R13.2 D1.2 1446,2250 1583,2250 1618,2285 3114,2285 3197,2202 v1(3197,1844) ; U8.2 2304.69,1171.68 ; U1.3 2699,561 2755,617 2755,785 2720,820 2562,820 2444,938 2444,1032.37 2304.69,1171.68 ; v1(3033,1679) 2864,1679 2813,1628 2761,1628 2304.69,1171.68
  Bottom Layer w7: v1(3033,1679) 3033,1680 v1(3197,1844)
VOC_ADC: R14.2 U4.2 U8.27 | length 2539.5
  Top Layer w7: v1(1307,1668) 1307,1612 1341.22,1577.78 U8.27 ; v1(2953,1829) 3079,1829 3104,1854 3104,1882.68 R14.2
  Top Layer w15: R14.2 3104.32,2003.29 U4.2
  Bottom Layer w7: v1(1307,1668) 1307,1845 1490,2028 2796,2028 2953,1871 v1(2953,1829)
pads on no net: B1.0 P2.7 P2.8 TF1.9 TF1.14 TF1.15 U1.7 U2.4 U6.2 U6.4 U6.5 U6.6 U6.7 U6.9 U6.10 U6.11 U6.12 U6.13 U6.14 U6.18 U6.19 U6.20 U8.1 U8.50 U8.55 U8.56 U8.61 USB1.0 USB1.4

## Polygon pours and split planes (outlines as drawn)
GND on Bottom Layer "Top Layer-No Net" (solid, remove dead copper, pour order 2): 0,0 3228.35,0 3228.35,2559.06 0,2559.06
GND on Top Layer "Top Layer-No Net" (solid, remove dead copper, pour order 4): 0,0 3228.35,0 3228.35,2559.06 0,2559.06

## Keep-outs
Keep-Out Layer:
  circle w3.94: c118.11,2440.94 r47.24
  circle w3.94: c118.11,118.11 r47.24
  circle w3.94: c3110.24,118.11 r47.24
  circle w3.94: c3110.24,2440.94 r47.24
  lines w7.87: 0,0 0,2559.06 3228.35,2559.06 3228.35,0 0,0

## Other copper
Top Layer:
  rectangle net VCC3.3: 1687,2092 1782,2142
  region net VCC3.3: 1098,2201 1098,2282 1051,2282 1051,2201
  rectangle net VCC3.3: 1759,839 1794,914
  rectangle net VCC3.3: 2600,1085 2645,1160
  rectangle net VCC5.0: 2117,814 2191,856
  rectangle net VCC5.0: 2881,1800 2919,1871
  rectangle net VCC3.3: 2501,1806 2601,1853
  rectangle net NetR9_1: 2302,1701 2377,1738
  pour cut-out: 2270,0.5 2270,415.5 2780,415.5 2780,0.5
  pour cut-out: 1357,0.5 1357,415.5 1867,415.5 1867,0.5
  pour cut-out: 442,0.5 442,415.5 952,415.5 952,0.5
  pour cut-out: 1876,2559.06 1876,2297 2995,2297 2995,2559
Bottom Layer:
  region net VCC3.3: 1098,2201 1098,2282 1051,2282 1051,2201
  rectangle net VCC3.3: 1686,2092 1783,2142
  rectangle net VCC3.3: 1760,839 1795,915
  rectangle net VCC3.3: 2600,1085 2645,1161
  rectangle net VCC5.0: 2118,816 2190,857
  rectangle net VCC5.0: 2882,1800 2918,1869
  rectangle net VCC3.3: 2501,1806 2601,1853
  rectangle net NetR9_1: 2302,1701 2377,1738
  pour cut-out: 1876,2559.06 1876,2297 2995,2297 2995,2559
  pour cut-out: 442,0.5 442,415.5 952,415.5 952,0.5
  pour cut-out: 1357,0.5 1357,415.5 1867,415.5 1867,0.5
  pour cut-out: 2270,0.5 2270,415.5 2780,415.5 2780,0.5

## Silkscreen, mask and mechanical layers (free items; w line width, h text height)
Top Overlay:
  text "3.3V" at 2974,1597 h80
  text "ZHANGTING V0.0" at 63,1381 h80
  text "2019-09-15" at 159,1304 h80
  text "SDA" at 108,1025 h80
  text "SCL" at 110,925 h80
  text "PWM" at 113,825 h80
  text "BAT" at 3079,802 h80
  text "U1_RX" at 110,730 h80
  text "CLK" at 1084,637 h80 r90
  text "GND" at 1283,635 h80 r90
  text "U1_TX" at 881,634 h80 r90
  text "DIO" at 986,634 h80 r90
  text "3.3V" at 1181,632 h80 r90
  text "U2_TX" at 110,629 h80
  text "U2_RX" at 109,523 h80
Top Solder:
  rectangle: 2518,433 2616,636

## Text inside footprints (layer, text, board x,y; h text height)
C6: Top Overlay "+" at 2435.11,691.87 h30 r90
C9: Top Overlay "+" at 2960.11,1032.87 h30 r90